# EAGLE board pavement_painter (EAGLE 9.1.3)
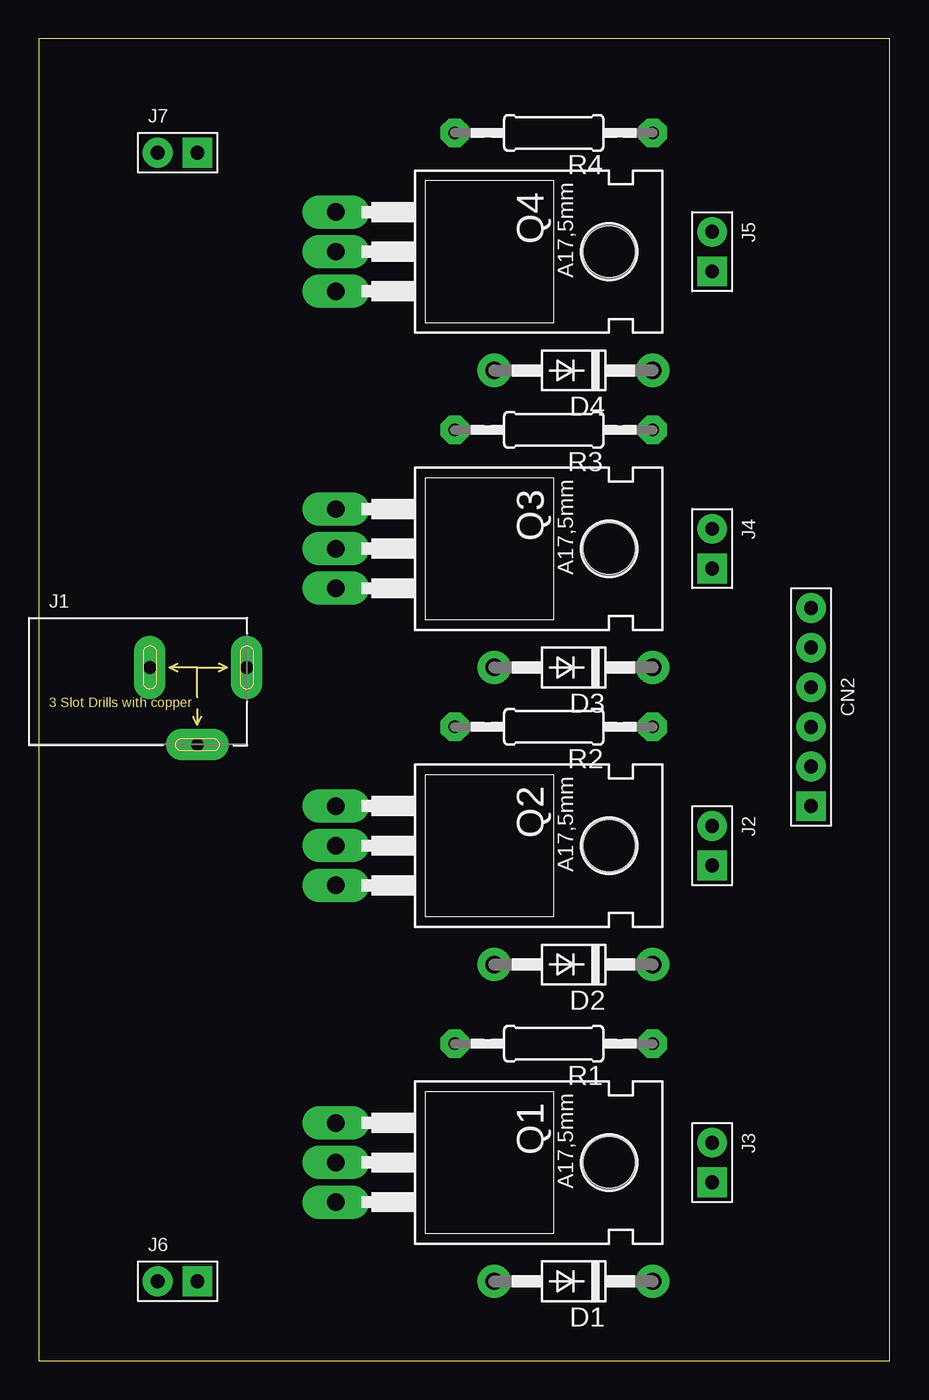
[diagram p0: board, top side]
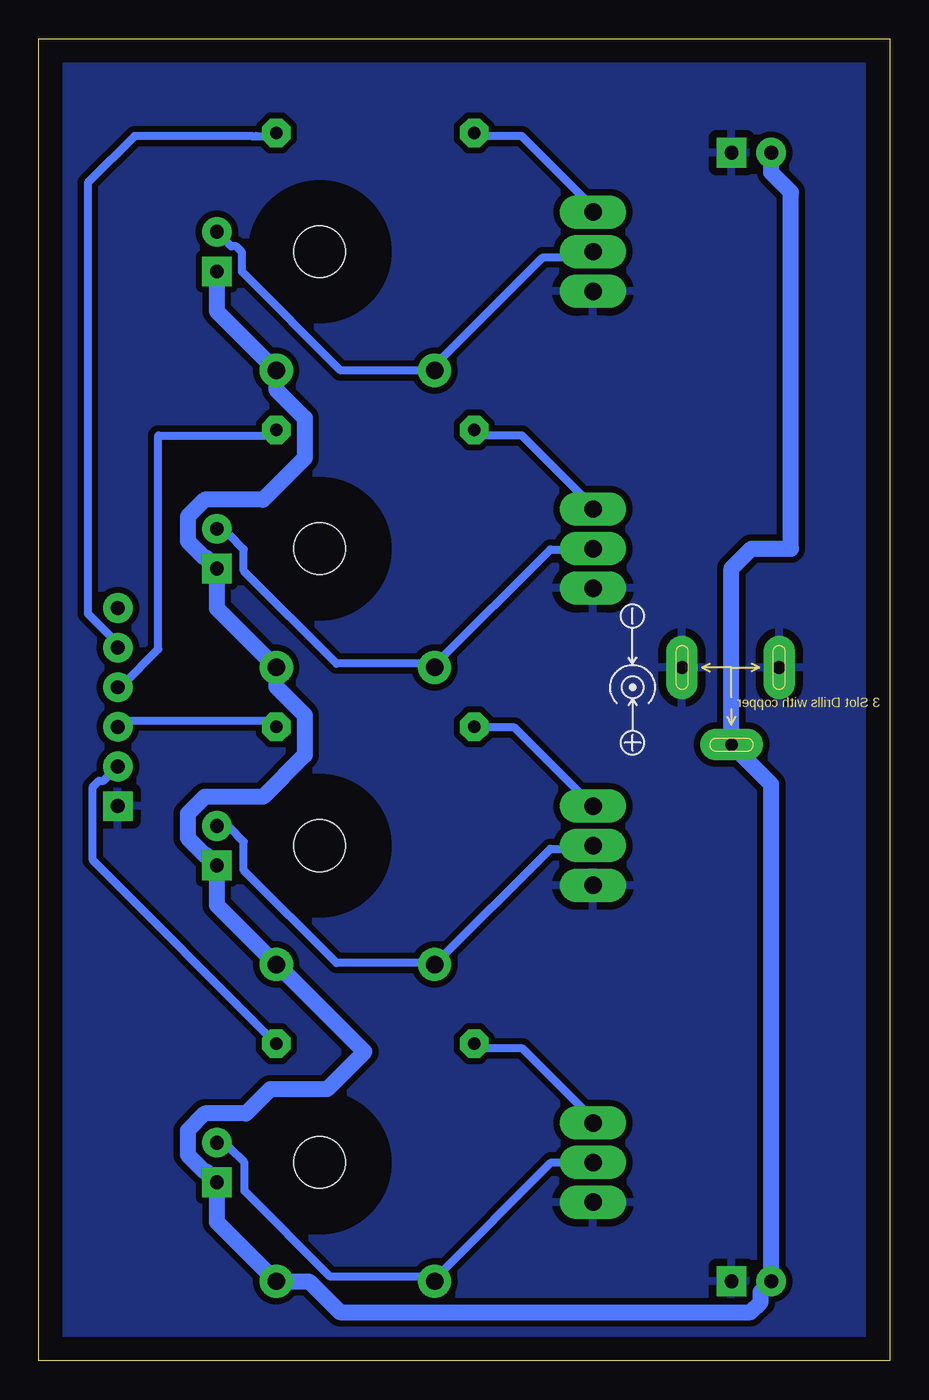
[diagram p1: board, bottom side, seen from below]

Size 54.59 x 84.76 mm. Coordinates in mm from the lower left corner, seen from the top.
Outline: 0,0 54.59,0 54.59,84.76 0,84.76 0,0
Copper layers (1*16): Top 0mil / dielectric 1.5mm / Bottom 0.035mm
Design rules "tad265_drc": minimum track width 20mil, minimum drill 0.35mm, track to track 16mil, track to pad 16mil, pad to pad 16mil, via to via 16mil, smd to smd 16mil, copper to edge 60mil, drill to drill 16mil, minimum pad ring 20mil, minimum via ring 15mil, stop-mask expansion 8mil, vias tented up to drill 0mil, thermal gap 20mil

## Footprints (pad centres in the part's own frame; a part is rotated, then mirrored left to right if it is on the bottom)
H6-2.54 = drill 0.889 pad 1.651 square: 1 0,6.35 | drill 0.889 pad 1.651: 2 0,3.81; 3 0,1.27; 4 0,-1.27; 5 0,-3.81; 6 0,-6.35
DO41-10 = drill 1.118 pad 1.93: A 5.08,0; C -5.08,0
DCJ3P-14.2X11.0X9.0MM = drill 0.813 pad 2.032 long: + 3.175,0; -1 -3.048,0; -2 0,-4.953
H2-2.54 = drill 0.889 pad 1.651 square: 1 0,1.27 | drill 0.889 pad 1.651: 2 0,-1.27
TO220AH = drill 1.118 long: B -2.54,-6.35; C 0,-6.35; E 2.54,-6.35 | hole 3.302: 0,11.176
0207/12 = drill 0.813 octagon: 1 -6.35,0; 2 6.35,0

## Placement (x,y rotation side)
CN2  6p-2.54  [H6-2.54]  49.53,41.91 180 top
D1  1N4004  [DO41-10]  34.29,5.08 180 top
D2  1N4004  [DO41-10]  34.29,25.4 180 top
D3  1N4004  [DO41-10]  34.29,44.45 180 top
D4  1N4004  [DO41-10]  34.29,63.5 180 top
FRAME1  FRAME-LETTER  [CREATIVE_COMMONS]  77.47,43.18 0 top  (outside the outline)
J1  DC-005  [DCJ3P-14.2X11.0X9.0MM]  10.16,44.45 0 top
J2  [H2-2.54]  43.18,33.02 180 top
J3  [H2-2.54]  43.18,12.7 180 top
J4  [H2-2.54]  43.18,52.07 180 top
J5  [H2-2.54]  43.18,71.12 180 top
J6  2p-2.54  [H2-2.54]  8.89,5.08 270 top
J7  2p-2.54  [H2-2.54]  8.89,77.47 270 top
Q1  TIP120  [TO220AH]  25.4,12.7 270 top
Q2  TIP120  [TO220AH]  25.4,33.02 270 top
Q3  TIP120  [TO220AH]  25.4,52.07 270 top
Q4  TIP120  [TO220AH]  25.4,71.12 270 top
R1  [0207/12]  33.02,20.32 180 top
R2  [0207/12]  33.02,40.64 180 top
R3  [0207/12]  33.02,59.69 180 top
R4  [0207/12]  33.02,78.74 180 top

## Library data of the parts
CN2 = Seeed-Connector; MPN: F185-1106A1BSYC1
D1-D4 = adafruit
FRAME1 = SparkFun-Aesthetics
J1 = Seeed-Connector; MPN: DC-005
J2-J5 = Seeed-Connector
J6 J7 = Seeed-Connector; MPN: P125-1102A0BS116A1
Q1-Q4 = transistor-power
R1-R4 = rcl; SPICEPREFIX: R

## Nets
+12V: D1.C D2.C D3.C D4.C J1.-2 J2.1 J3.1 J4.1 J5.1 J6.2 J7.2
GND: CN2.1 J1.+ J1.-1 J6.1 J7.1 Q1.E Q2.E Q3.E Q4.E
N$1: D2.A J2.2 Q2.C
N$2: Q2.B R2.2
N$3: D1.A J3.2 Q1.C
N$4: Q1.B R1.2
N$5: D3.A J4.2 Q3.C
N$6: Q3.B R3.2
N$7: D4.A J5.2 Q4.C
N$8: Q4.B R4.2
PCA_PIN1: CN2.2 R1.1
PCA_PIN2: CN2.3 R2.1
PCA_PIN3: CN2.4 R3.1
PCA_PIN4: CN2.5 R4.1
UNUSED: CN2.6

## Tracks (layer width: path | path; a pad name or v marks a point on that pad's centre or on a via)
+12V
  Bottom 1.016: J5.1 43.18,67.31 D4.C 39.37,62.28 37.54,60.45 37.54,57.88 40.22,55.21 43.95,55.21 45.05,54.11 45.05,52.57 43.95,51.47 43.85,51.47 J4.1 43.18,48.26 D3.C 39.37,43.23 37.54,41.4 37.54,38.84 40.22,36.16 43.95,36.16 45.05,35.06 45.05,33.52 43.95,32.42 43.85,32.42 J2.1 43.18,29.21 D2.C 39.32,25.4 33.72,19.8 36.12,17.4 39.75,17.4 41.31,15.84 43.95,15.84 45.05,14.74 45.05,13.2 43.95,12.1 43.85,12.1 J3.1 43.18,8.89 D1.C 37.26,5.08 35.28,3.1 8.94,3.1 8.29,3.75 8.29,4.41 J6.2 7.62,36.96 J1.-2 10.16,50.8 8.89,52.07 6.35,52.07 6.35,74.93 7.62,76.2 J7.2
GND
  pour Bottom (isolate 0.406): 0,0 0,85.09 54.61,85.09 54.61,0
N$1
  Bottom 0.508: J2.2 42.82,34.19 42.37,34.19 41.45,33.27 41.45,31.45 35.51,25.5 29.57,25.5 D2.A 21.79,32.82 19.05,32.82 Q2.C
N$2
  Bottom 0.508: Q2.B 24.08,40.59 26.36,40.59 R2.2
N$3
  Bottom 0.508: J3.2 42.77,13.61 42.32,13.61 41.4,12.7 41.4,10.87 35.92,5.38 29.52,5.38 D1.A 29.06,5.23 29.06,5.38 21.74,12.7 Q1.C
N$4
  Bottom 0.508: R1.2 26.36,20.02 23.57,20.02 19,15.44 Q1.B
N$5
  Bottom 0.508: J4.2 42.82,52.93 42.37,52.93 41.45,52.02 41.45,50.65 35.51,44.7 29.57,44.7 D3.A 29.11,44.7 21.79,52.02 19.05,52.02 Q3.C
N$6
  Bottom 0.508: R3.2 26.36,59.33 23.62,59.33 19.05,54.76 Q3.B
N$7
  Bottom 0.508: Q4.C 19.05,70.76 22.25,70.76 29.11,63.91 D4.A 35.24,63.5 41.57,69.83 41.57,71.08 41.95,71.46 42.25,71.46 J5.2
N$8
  Bottom 0.508: R4.2 26.36,78.54 23.62,78.54 19.05,73.97 Q4.B
PCA_PIN1
  Bottom 0.508: CN2.2 50.46,37.17 50.76,37.17 51.14,36.79 51.14,32.09 R1.1
PCA_PIN2
  Bottom 0.508: R2.1 39.62,41.05 49.23,41.05 CN2.3
PCA_PIN3
  Bottom 0.508: R3.1 39.62,59.33 46.94,59.33 46.94,45.62 49.23,43.33 CN2.4
PCA_PIN4
  Bottom 0.508: R4.1 39.57,78.54 40.64,78.54 40.95,78.54 48.46,78.54 51.46,75.54 51.46,47.9 49.63,46.08 CN2.5